# EAGLE board ccshield (EAGLE 5.04)
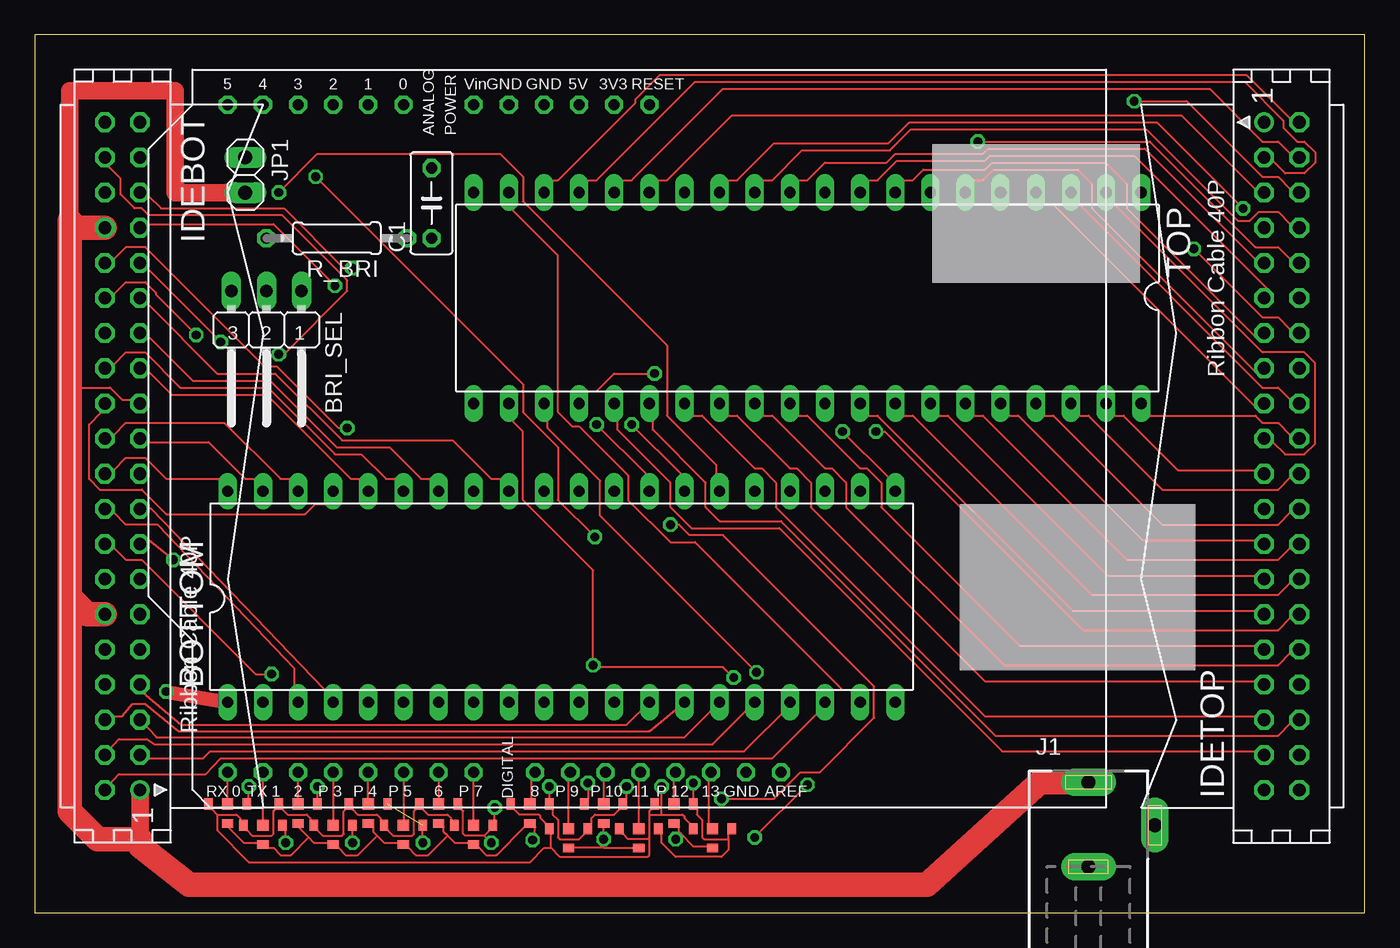
[diagram p0: board, top side]
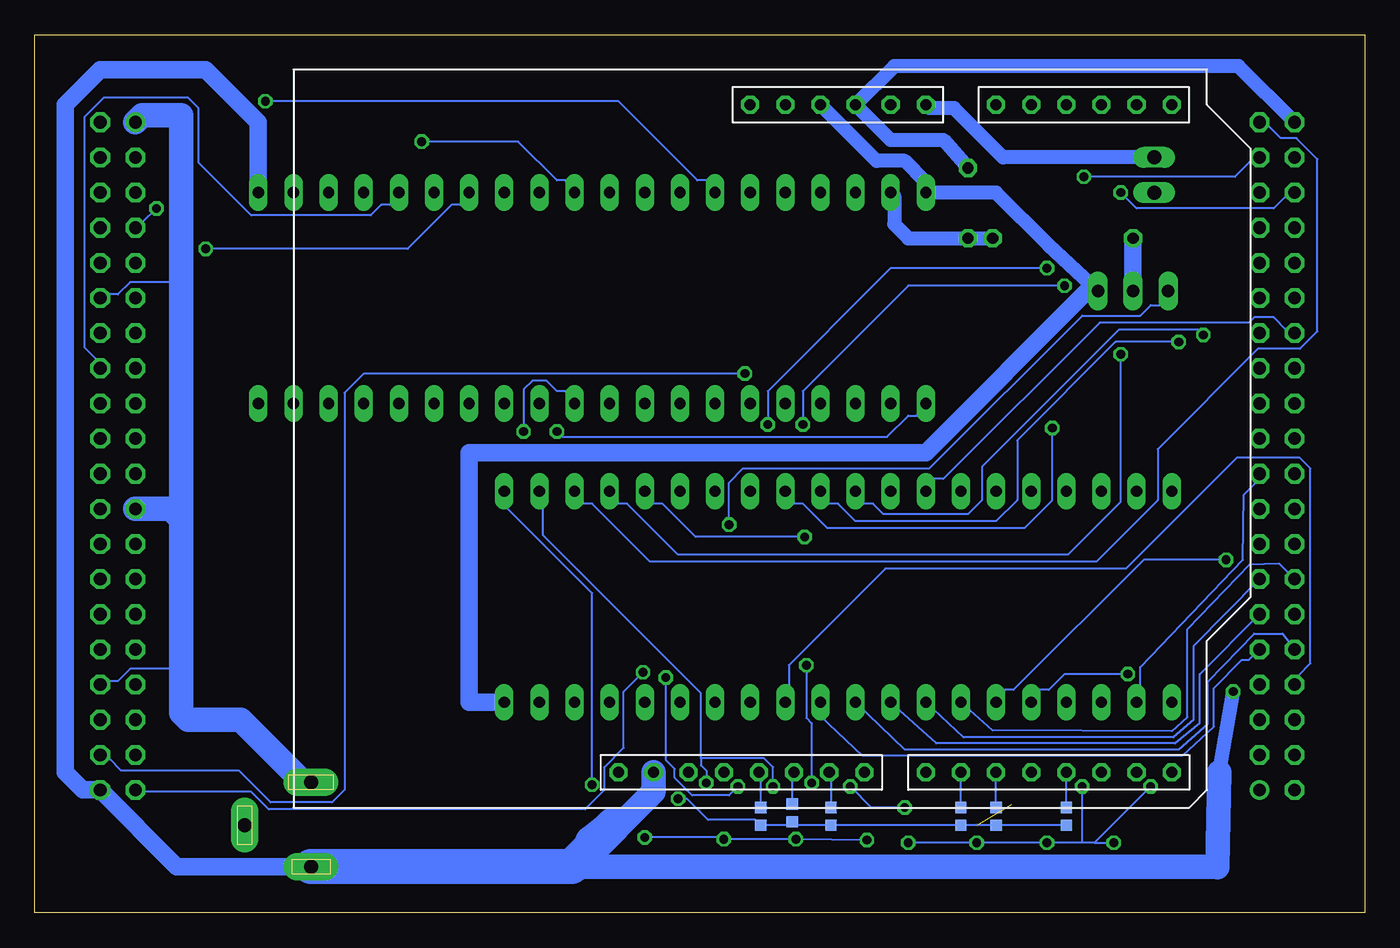
[diagram p1: board, bottom side, seen from below]

Size 96.19 x 63.49 mm. Coordinates in mm from the lower left corner, seen from the top.
Outline: 0,0 96.19,0 96.19,63.49 0,63.49 0,0
Copper layers (1*16): Top 0.035mm / dielectric 1.5mm / Bottom 0.035mm
Design rules "default *": minimum track width 6mil, minimum drill 25mil, track to track 10mil, track to pad 10mil, pad to pad 10mil, via to via 0.6mm, smd to smd 10mil, copper to edge 25mil, drill to drill 0.7mm, minimum pad ring 10mil, minimum via ring 8mil, stop-mask expansion 4mil, vias tented up to drill 0mil, thermal gap 10mil

## Footprints (pad centres in the part's own frame; a part is rotated, then mirrored left to right if it is on the bottom)
DIL40 = drill 0.813 long: BRIGHTNESS 21.59,-7.62; CLKIN 24.13,7.62; DATAIN 21.59,7.62; GND -24.13,-7.62; OUT01 19.05,-7.62; OUT02 16.51,-7.62; OUT03 13.97,-7.62; OUT04 11.43,-7.62; OUT05 8.89,-7.62; OUT06 6.35,-7.62; OUT07 3.81,-7.62; OUT08 1.27,-7.62; OUT09 -1.27,-7.62; OUT10 -3.81,-7.62; OUT11 -6.35,-7.62; OUT12 -8.89,-7.62; OUT13 -11.43,-7.62; OUT14 -13.97,-7.62; OUT15 -16.51,-7.62; OUT16 -19.05,-7.62; OUT17 -21.59,-7.62; OUT18 -24.13,7.62; OUT19 -21.59,7.62; OUT20 -19.05,7.62; OUT21 -16.51,7.62; OUT22 -13.97,7.62; OUT23 -11.43,7.62; OUT24 -8.89,7.62; OUT25 -6.35,7.62; OUT26 -3.81,7.62; OUT27 -1.27,7.62; OUT28 1.27,7.62; OUT29 3.81,7.62; OUT30 6.35,7.62; OUT31 8.89,7.62; OUT32 11.43,7.62; OUT33 13.97,7.62; OUT34 16.51,7.62; OUT35 19.05,7.62; PWR 24.13,-7.62
JP2W = drill 0.914 long: 1 -2.54,-1.27; 2 0,-1.27; 3 2.54,-1.27
C050-030X075 = drill 0.813 octagon: 1 -2.54,0; 2 2.54,0
CON40L = drill 0.914 round: 1 24.13,1.27 | drill 0.914 octagon: 2 24.13,-1.27; 3 21.59,1.27; 4 21.59,-1.27; 5 19.05,1.27; 6 19.05,-1.27; 7 16.51,1.27; 8 16.51,-1.27; 9 13.97,1.27; 10 13.97,-1.27; 11 11.43,1.27; 12 11.43,-1.27; 13 8.89,1.27; 14 8.89,-1.27; 15 6.35,1.27; 16 6.35,-1.27; 17 3.81,1.27; 18 3.81,-1.27; 19 1.27,1.27; 20 1.27,-1.27; 21 -1.27,1.27; 22 -1.27,-1.27; 23 -3.81,1.27; 24 -3.81,-1.27; 25 -6.35,1.27; 26 -6.35,-1.27; 27 -8.89,1.27; 28 -8.89,-1.27; 29 -11.43,1.27; 30 -11.43,-1.27; 31 -13.97,1.27; 32 -13.97,-1.27; 33 -16.51,1.27; 34 -16.51,-1.27; 35 -19.05,1.27; 36 -19.05,-1.27; 37 -21.59,1.27; 38 -21.59,-1.27; 39 -24.13,1.27; 40 -24.13,-1.27
DCJ0202 = drill 1 pad 2 long: 1 0,3.1; 2 4.8,0; 3 0,-3
1X02 = drill 1.016 long: 1 -1.27,0; 2 1.27,0
0207/10 = drill 0.813 octagon: 1 -5.08,0; 2 5.08,0
SBM1.3-1 = smd 0.813 x 0.813: IN 0,0 | smd 0.813 x 0.61: OUT1 0,1.397; OUT3 0,-1.397 | smd 0.61 x 0.813: OUT2 1.397,0
SHIELD-OCTAGONALPAD = drill 0.8 pad 1.27 octagon: 0_RX -25.4,27.94; 1_TX -25.4,25.4; 2 -25.4,22.86; 3 -25.4,20.32; 3V3 22.86,0; 4 -25.4,17.78; 5 -25.4,15.24; 5V 22.86,2.54; 6 -25.4,12.7; 7 -25.4,10.16; 8 -25.4,5.715; 9 -25.4,3.175; 10 -25.4,0.635; 11 -25.4,-1.905; 12 -25.4,-4.445; 13 -25.4,-6.985; A_0 22.86,15.24; A_1 22.86,17.78; A_2 22.86,20.32; A_3 22.86,22.86; A_4 22.86,25.4; A_5 22.86,27.94; AREF -25.4,-12.065; GND0 -25.4,-9.525; GND1 22.86,7.62; GND2 22.86,5.08; RESET 22.86,-2.54; VIN 22.86,10.16
SBM1.1 = smd 0.813 x 0.813: IN 0,0; OUT 1.27,0

## Placement (x,y rotation side)
BOTTOM  ST-M5451PDIP40  [DIL40]  38.1,22.86 0 top
BRI_SEL  [JP2W]  16.76,43.69 180 top
C1  [C050-030X075]  28.7,51.31 90 top
IDEBOT  [CON40L]  6.35,33.02 270 top
IDETOP  [CON40L]  90.17,33.02 90 top
J1  DCJ0202  [DCJ0202]  76.2,6.35 0 top
JP1  [1X02]  15.24,53.34 270 top
R_BRI  [0207/10]  21.84,48.77 180 top
TOP  ST-M5451PDIP40  [DIL40]  55.88,44.45 180 top
U$2  SBM1-3SMD  [SBM1.3-1]  13.97,7.87 270 top
U$3  ARDUINO-USBOCTAGONAL_PADS  [SHIELD-OCTAGONALPAD]  41.91,35.56 90 top
U$4  SBM1.1  [SBM1.1]  43.69,7.62 270 bottom
U$5  SBM1-3SMD  [SBM1.3-1]  16.51,6.35 270 top
U$6  SBM1-3SMD  [SBM1.3-1]  19.05,7.87 270 top
U$7  SBM1-3SMD  [SBM1.3-1]  21.59,6.35 270 top
U$8  SBM1-3SMD  [SBM1.3-1]  24.13,7.87 270 top
U$9  SBM1-3SMD  [SBM1.3-1]  26.67,6.35 270 top
U$10  SBM1-3SMD  [SBM1.3-1]  29.21,7.87 270 top
U$11  SBM1-3SMD  [SBM1.3-1]  31.75,6.35 270 top
U$12  SBM1-3SMD  [SBM1.3-1]  35.81,7.87 270 top
U$13  SBM1-3SMD  [SBM1.3-1]  38.61,6.1 270 top
U$14  SBM1-3SMD  [SBM1.3-1]  41.15,7.87 270 top
U$15  SBM1-3SMD  [SBM1.3-1]  43.69,6.1 270 top
U$16  SBM1-3SMD  [SBM1.3-1]  46.23,7.87 270 top
U$17  SBM1-3SMD  [SBM1.3-1]  49.02,6.1 270 top
U$18  SBM1.1  [SBM1.1]  41.4,7.87 270 bottom
U$19  SBM1.1  [SBM1.1]  38.61,7.62 270 bottom
U$20  SBM1.1  [SBM1.1]  29.21,7.62 270 bottom
U$21  SBM1.1  [SBM1.1]  26.67,7.62 270 bottom
U$22  SBM1.1  [SBM1.1]  21.59,7.62 270 bottom

## Library data of the parts
BOTTOM TOP U$2 U$4-U$22 = stone
BRI_SEL = jumper
C1 R_BRI = rcl
IDEBOT IDETOP = con-harting
J1 = con-jack
JP1 = pinhead
U$3 = Arduino-Various

## Nets
3V3: U$3.3V3
CLK: BOTTOM.CLKIN TOP.CLKIN U$2.OUT2 U$5.OUT2 U$6.OUT2 U$7.OUT2 U$8.OUT2 U$9.OUT2 U$10.OUT2 U$11.OUT2 U$12.OUT2 U$13.OUT2 U$14.OUT2 U$15.OUT2 U$16.OUT2 U$17.OUT2
GND2: C1.2 IDEBOT.40 U$3.GND2
N$2: BRI_SEL.2 R_BRI.2
N$3: BOTTOM.BRIGHTNESS C1.1 R_BRI.1 TOP.BRIGHTNESS
N$4: JP1.1 U$3.VIN
N$6: IDETOP.2 TOP.OUT01
N$7: IDETOP.3 TOP.OUT02
N$8: IDETOP.4 TOP.OUT03
N$9: IDETOP.5 TOP.OUT04
N$10: IDETOP.6 TOP.OUT05
N$11: IDETOP.7 TOP.OUT06
N$12: IDETOP.8 TOP.OUT07
N$13: IDETOP.9 TOP.OUT08
N$14: IDETOP.10 TOP.OUT09
N$15: IDETOP.11 TOP.OUT10
N$16: TOP.DATAIN U$2.OUT3 U$5.OUT3 U$6.OUT3 U$7.OUT3 U$8.OUT3 U$9.OUT3 U$10.OUT3 U$11.OUT3 U$12.OUT3 U$13.OUT3 U$14.OUT3 U$15.OUT3 U$16.OUT3 U$17.OUT3
N$17: IDETOP.13 TOP.OUT11
N$18: IDETOP.14 TOP.OUT12
N$19: IDETOP.15 TOP.OUT13
N$20: IDETOP.16 TOP.OUT14
N$21: IDETOP.17 TOP.OUT15
N$22: IDETOP.18 TOP.OUT16
N$23: IDETOP.19 TOP.OUT17
N$24: IDETOP.20 TOP.OUT18
N$25: IDETOP.24 TOP.OUT21
N$26: IDETOP.22 TOP.OUT20
N$27: IDETOP.21 TOP.OUT19
N$28: IDETOP.25 TOP.OUT22
N$29: IDETOP.26 TOP.OUT23
N$30: IDETOP.27 TOP.OUT24
N$31: IDETOP.28 TOP.OUT25
N$32: IDETOP.29 TOP.OUT26
N$33: IDETOP.30 TOP.OUT27
N$34: IDETOP.31 TOP.OUT28
N$35: IDETOP.32 TOP.OUT29
N$36: IDETOP.33 TOP.OUT30
N$37: IDETOP.35 TOP.OUT31
N$38: IDETOP.36 TOP.OUT32
N$39: IDETOP.37 TOP.OUT33
N$40: IDETOP.38 TOP.OUT34
N$41: IDETOP.39 TOP.OUT35
N$42: BOTTOM.DATAIN U$2.OUT1 U$5.OUT1 U$6.OUT1 U$7.OUT1 U$8.OUT1 U$9.OUT1 U$10.OUT1 U$11.OUT1 U$12.OUT1 U$13.OUT1 U$14.OUT1 U$15.OUT1 U$16.OUT1 U$17.OUT1
N$43: U$2.IN U$3.0_RX
N$44: BOTTOM.OUT03 IDEBOT.4
N$45: BOTTOM.OUT04 IDEBOT.5
N$46: BOTTOM.OUT05 IDEBOT.6
N$47: BOTTOM.OUT07 IDEBOT.8
N$48: BOTTOM.OUT08 IDEBOT.9
N$49: U$3.1_TX U$5.IN
N$50: BOTTOM.OUT01 IDEBOT.2
N$51: BOTTOM.OUT02 IDEBOT.3
N$52: BOTTOM.OUT06 IDEBOT.7
N$53: BOTTOM.OUT09 IDEBOT.10
N$54: BOTTOM.OUT10 IDEBOT.11
N$55: BOTTOM.OUT11 IDEBOT.13
N$56: BOTTOM.OUT12 IDEBOT.14
N$57: BOTTOM.OUT13 IDEBOT.15
N$58: BOTTOM.OUT14 IDEBOT.16
N$59: BOTTOM.OUT15 IDEBOT.17
N$60: BOTTOM.OUT16 IDEBOT.18
N$61: BOTTOM.OUT17 IDEBOT.19
N$62: BOTTOM.OUT18 IDEBOT.20
N$63: BOTTOM.OUT20 IDEBOT.22
N$64: BOTTOM.OUT19 IDEBOT.21
N$65: BOTTOM.OUT21 IDEBOT.24
N$66: BOTTOM.OUT22 IDEBOT.25
N$67: BOTTOM.OUT23 IDEBOT.26
N$68: BOTTOM.OUT24 IDEBOT.27
N$69: BOTTOM.OUT25 IDEBOT.28
N$70: BOTTOM.OUT26 IDEBOT.29
N$71: BOTTOM.OUT27 IDEBOT.30
N$72: BOTTOM.OUT28 IDEBOT.31
N$73: BOTTOM.OUT29 IDEBOT.32
N$74: BOTTOM.OUT30 IDEBOT.33
N$75: BOTTOM.OUT31 IDEBOT.35
N$76: BOTTOM.OUT32 IDEBOT.36
N$77: BOTTOM.OUT33 IDEBOT.37
N$78: BOTTOM.OUT34 IDEBOT.38
N$79: BOTTOM.OUT35 IDEBOT.39
N$80: U$3.2 U$6.IN
N$81: U$3.3 U$7.IN U$22.IN
N$82: U$3.4 U$8.IN
N$83: U$3.5 U$9.IN U$21.IN
N$84: U$3.6 U$10.IN U$20.IN
N$85: U$3.7 U$11.IN
N$86: U$3.8 U$12.IN
N$87: U$3.9 U$13.IN U$19.IN
N$88: U$3.10 U$14.IN U$18.IN
N$89: U$3.11 U$4.IN U$15.IN
N$90: U$3.12 U$16.IN
N$91: U$3.13 U$17.IN
N$92: BRI_SEL.3 U$4.OUT U$18.OUT U$19.OUT U$20.OUT U$21.OUT U$22.OUT
N$95: BOTTOM.GND IDETOP.40 J1.3 TOP.GND U$3.GND0
PWR_IC: BOTTOM.PWR BRI_SEL.1 TOP.PWR U$3.5V
PWRNET: IDEBOT.1 IDEBOT.12 IDEBOT.23 IDEBOT.34 IDETOP.1 IDETOP.12 IDETOP.23 IDETOP.34 J1.1 JP1.2

## Tracks (layer width: path | path; a pad name or v marks a point on that pad's centre or on a via)
CLK  (via drill 0.64)
  Top 0.152: 46.74,5.71 47.62,4.83 48.64,4.83 U$17.OUT2 | 46.74,5.71 46.61,5.84 46.61,6.22 U$16.OUT2 | 41.15,4.7 U$13.OUT2 | 41.15,4.7 U$15.OUT2 | 41.15,4.7 v41.15,5.33 U$14.OUT2 | v46.35,5.33 46.74,5.71 | 29.84,5.59 30.35,5.08 31.37,5.08 U$11.OUT2 32.13,4.7 32.64,4.19 33.4,4.19 35.43,6.22 U$12.OUT2 36.2,6.22 v36.01,5.27 | 29.84,5.59 29.59,5.84 29.59,6.22 U$10.OUT2 | 24.77,5.59 25.27,5.08 26.29,5.08 U$9.OUT2 27.05,4.7 27.56,4.19 28.45,4.19 29.84,5.59 | 24.77,5.59 24.51,5.84 24.51,6.22 U$8.OUT2 | U$2.OUT2 13.97,6.22 15.11,5.08 16.13,5.08 U$5.OUT2 16.89,4.7 17.27,4.7 17.78,4.19 18.54,4.19 19.81,5.46 | 19.81,5.46 19.05,6.22 U$6.OUT2 | 19.81,5.46 20.19,5.08 21.21,5.08 U$7.OUT2 21.97,4.7 22.48,4.19 23.37,4.19 24.77,5.59 | v58.42,34.8 61.72,31.5 BOTTOM.CLKIN | v52.07,5.46 v55.88,9.27
  Bottom 0.152: v36.01,5.27 v41.15,5.33 v46.35,5.33 46.86,5.46 v52.07,5.46 | v58.42,34.8 58.04,34.42 34.54,34.42 33.02,35.94 32.38,35.94 TOP.CLKIN | v55.88,9.27 55.88,23.11 61.98,29.21 BOTTOM.CLKIN
GND2
  Bottom 1.016: C1.2 30.48,55.88 34.29,55.88 U$3.GND2 34.04,61.21 9.14,61.21 IDEBOT.40
N$2
  Bottom 1.27: BRI_SEL.2 R_BRI.2
N$3
  Top 0.152: BOTTOM.BRIGHTNESS 59.05,16.13 58.42,16.13 47.75,26.8 45.97,26.8 42.93,29.84 42.93,31.62 39.37,35.18 38.86,35.18 37.85,36.19 37.85,47.5 34.54,50.8 TOP.BRIGHTNESS
  Bottom 1.016: R_BRI.1 C1.1 33.02,48.77 34.04,49.78 34.04,51.82 TOP.BRIGHTNESS
N$4
  Bottom 1.016: JP1.1 26.16,54.61 29.72,58.17 31.5,58.17 U$3.VIN
N$6
  Top 0.152: TOP.OUT01 37.47,52.96 37.85,52.96 43.43,58.55 43.43,58.8 45.21,60.58 87.63,60.58 90.81,57.4 IDETOP.2
N$7
  Top 0.152: TOP.OUT02 40.01,52.96 40.64,52.96 47.75,60.07 87.5,60.07 90.3,57.28 90.3,56.77 91.31,55.75 91.82,55.75 92.58,54.99 92.58,54.23 91.82,53.47 90.42,53.47 89.53,54.36 IDETOP.3
N$8
  Top 0.152: TOP.OUT03 42.55,52.96 43.18,52.96 49.78,59.56 84.96,59.56 88.77,55.75 89.92,55.75 90.81,54.86 IDETOP.4
N$9
  Top 0.152: TOP.OUT04 45.09,52.96 45.72,52.96 50.42,57.66 82.93,57.66 88.27,52.32 IDETOP.5
N$10  (via drill 0.64)
  Top 0.152: v79.5,58.67 83.31,58.67 88.77,53.21 89.92,53.21 90.81,52.32 IDETOP.6
  Bottom 0.152: v79.5,58.67 53.98,58.67 48.26,52.96 47.62,52.96 TOP.OUT05
N$11  (via drill 0.64)
  Top 0.152: v87.38,50.93 81.15,57.15 63.25,57.15 61.72,55.63 53.47,55.63 50.8,52.96 50.16,52.96 TOP.OUT06
  Bottom 0.152: v87.38,50.93 88.39,49.91 IDETOP.7
N$12
  Top 0.152: TOP.OUT07 52.7,52.96 53.34,52.96 55.5,55.12 61.85,55.12 63.37,56.64 80.39,56.64 87,50.04 87.88,50.04 88.52,50.67 89.92,50.67 90.81,49.78 IDETOP.8
N$13
  Top 0.152: TOP.OUT08 55.24,52.96 55.88,52.96 57.15,54.23 61.59,54.23 62.23,54.86 68.58,54.86 68.96,55.24 80.26,55.24 88.27,47.24 IDETOP.9
N$14  (via drill 0.64)
  Top 0.152: v68.2,55.75 80.64,55.75 88.27,48.13 89.92,48.13 90.81,47.24 IDETOP.10
  Bottom 0.152: v68.2,55.75 61.21,55.75 58.42,52.96 57.78,52.96 TOP.OUT09
N$15
  Top 0.152: TOP.OUT10 60.33,52.96 60.96,52.96 62.36,54.36 68.71,54.36 69.09,54.74 79.5,54.74 89.15,45.08 IDETOP.11
N$16  (via drill 0.64)
  Top 0.152: v40.01,9.4 40.01,8.25 U$14.OUT3 | TOP.DATAIN 34.54,35.56 35.31,34.8 35.31,29.84 40.39,24.76 v40.39,17.91 40.89,17.78 49.78,17.78 v50.55,17.02 | U$12.OUT3 34.67,7.49 35.05,7.11 36.45,7.11 36.58,6.98 36.58,6.86 36.96,6.48 U$13.OUT3 37.34,5.71 37.34,4.7 | 44.45,5.46 44.32,5.33 42.93,5.33 42.55,5.71 U$15.OUT3 | 44.45,7.11 44.45,7.37 44.58,7.49 U$16.OUT3 | 44.45,5.46 44.45,7.11 | 44.45,7.11 45.34,7.11 | 45.34,7.11 46.86,7.11 46.99,6.98 46.99,6.86 47.37,6.48 U$17.OUT3 | 37.34,4.7 37.97,4.06 44.32,4.06 44.45,4.19 44.45,5.46 | 13.21,7.11 14.61,7.11 14.86,6.86 14.86,6.73 U$5.OUT3 15.37,5.97 15.75,5.59 17.14,5.59 17.27,5.71 17.27,7.37 17.4,7.49 U$6.OUT3 17.91,7.49 18.29,7.11 19.68,7.11 19.94,6.86 19.94,6.73 U$7.OUT3 20.45,5.97 20.83,5.59 22.23,5.59 22.35,5.71 22.35,7.37 22.48,7.49 U$8.OUT3 22.99,7.49 23.37,7.11 24.77,7.11 25.02,6.86 25.02,6.73 U$9.OUT3 25.53,5.97 25.91,5.59 27.3,5.59 27.43,5.71 27.43,7.37 27.56,7.49 U$10.OUT3 28.07,7.49 28.45,7.11 29.84,7.11 30.1,6.86 30.1,6.73 U$11.OUT3 | 13.21,7.11 12.83,7.49 U$2.OUT3 | 37.34,4.7 36.83,4.7 35.81,3.68 15.49,3.68 13.21,5.97 13.21,7.11 | 45.34,7.11 v45.34,9.14
  Bottom 0.152: v40.01,9.4 40.01,13.72 40.39,14.1 v40.39,17.91 | v50.55,17.02 50.55,11.05 49.91,10.41 49.91,9.78 48.64,8.51 45.97,8.51 v45.34,9.14
N$17
  Top 0.152: TOP.OUT11 62.87,52.96 63.5,52.96 64.26,53.72 68.71,53.72 69.22,54.23 77.47,54.23 78.99,52.7 78.99,50.93 88.27,41.66 IDETOP.13
N$18  (via drill 0.64)
  Top 0.152: v83.82,48.01 88.77,43.05 89.92,43.05 90.81,42.16 IDETOP.14
  Bottom 0.152: v83.82,48.01 69.22,48.01 66.04,51.18 65.41,51.18 TOP.OUT12
N$19
  Top 0.152: TOP.OUT13 67.94,52.96 68.58,52.96 69.34,53.72 75.44,53.72 76.45,52.7 76.45,50.93 88.27,39.12 IDETOP.15
N$20
  Bottom 0.152: TOP.OUT14 70.48,51.18 71.12,51.18 71.88,50.42 80.52,50.42 84.33,54.23 84.33,58.17 85.09,58.93 91.19,58.93 92.58,57.53 92.58,40.89 91.69,40 IDETOP.16
N$21
  Top 0.152: TOP.OUT15 73.03,51.18 73.66,51.18 88.27,36.58 IDETOP.17
N$22
  Top 0.152: TOP.OUT16 75.56,51.18 88.77,37.97 89.92,37.97 90.81,37.08 IDETOP.18
N$23
  Top 0.152: TOP.OUT17 78.11,51.18 88.77,40.51 91.82,40.51 92.58,39.75 92.58,33.91 91.82,33.15 90.42,33.15 89.53,34.04 IDETOP.19
N$24
  Top 0.152: TOP.OUT18 80.64,35.94 88.27,35.94 88.77,35.43 89.92,35.43 90.81,34.54 IDETOP.20
N$25
  Top 0.152: TOP.OUT21 73.03,35.94 73.66,35.94 81.53,28.07 89.92,28.07 90.81,28.96 IDETOP.24
N$26
  Top 0.152: TOP.OUT20 75.56,35.94 76.2,35.94 81.53,30.61 89.92,30.61 90.81,31.5 IDETOP.22
N$27
  Top 0.152: TOP.OUT19 78.11,35.94 78.74,35.94 82.68,32 88.27,32 IDETOP.21
N$28
  Top 0.152: TOP.OUT22 70.48,35.94 71.12,35.94 80.14,26.92 88.27,26.92 IDETOP.25
N$29
  Top 0.152: TOP.OUT23 67.94,35.94 68.58,35.94 78.99,25.53 89.92,25.53 90.81,26.42 IDETOP.26
N$30
  Top 0.152: TOP.OUT24 65.41,35.94 66.04,35.94 77.6,24.38 88.27,24.38 IDETOP.27
N$31
  Top 0.152: TOP.OUT25 62.87,35.94 63.5,35.94 76.45,22.99 89.92,22.99 90.81,23.88 IDETOP.28
N$32
  Top 0.152: TOP.OUT26 60.33,35.94 60.96,35.94 75.06,21.84 88.27,21.84 IDETOP.29
N$33  (via drill 0.64)
  Top 0.152: v60.83,34.8 61.47,34.8 75.82,20.45 89.92,20.45 90.81,21.34 IDETOP.30
  Bottom 0.152: v60.83,34.8 60.83,37.85 60.2,38.48 59.18,38.48 58.42,37.72 57.78,37.72 TOP.OUT27
N$34
  Top 0.152: TOP.OUT28 55.24,35.94 55.88,35.94 59.69,32.13 60.2,32.13 61.21,31.11 61.21,29.34 71.25,19.3 88.27,19.3 IDETOP.31
N$35
  Top 0.152: TOP.OUT29 52.7,35.94 53.34,35.94 57.15,32.13 57.66,32.13 58.67,31.11 58.67,29.34 70.1,17.91 89.92,17.91 90.81,18.8 IDETOP.32
N$36
  Top 0.152: TOP.OUT30 50.16,35.94 50.8,35.94 54.61,32.13 55.12,32.13 56.13,31.11 56.13,29.34 68.71,16.76 88.27,16.76 IDETOP.33
N$37
  Top 0.152: TOP.OUT31 47.62,35.94 48.26,35.94 52.07,32.13 52.58,32.13 53.59,31.11 53.59,29.34 68.71,14.22 88.27,14.22 IDETOP.35
N$38
  Top 0.152: TOP.OUT32 44.7,35.56 44.7,34.92 48.51,31.11 48.51,29.34 49.53,28.32 53.98,28.32 69.47,12.83 89.92,12.83 90.81,13.72 IDETOP.36
N$39
  Top 0.152: TOP.OUT33 42.16,35.56 42.16,34.92 45.97,31.11 45.97,29.34 47.5,27.81 53.85,27.81 69.98,11.68 88.27,11.68 IDETOP.37
N$40  (via drill 0.64)
  Top 0.152: v44.83,38.99 41.91,38.99 40.64,37.72 40.01,37.72 TOP.OUT34
  Bottom 0.152: v44.83,38.99 72.39,38.99 73.79,37.59 73.79,8.89 74.68,8 79.12,8 81.41,10.29 89.92,10.29 90.81,11.18 IDETOP.38
N$41  (via drill 0.64)
  Top 0.152: v52.2,17.4 40.89,28.7 40.89,31.24 37.08,35.05 37.08,35.56 TOP.OUT35
  Bottom 0.152: v52.2,17.4 53.59,16 53.59,11.94 54.99,10.54 54.99,8.89 56.39,7.49 79.25,7.49 80.52,8.76 88.27,8.76 IDETOP.39
N$42  (via drill 0.64)  (1 unrouted)
  Top 0.152: 32.51,5.59 32.89,5.97 U$11.OUT1 33.27,6.73 v33.27,7.62 | 32.51,5.59 31.11,5.59 30.99,5.71 30.99,7.37 30.86,7.49 U$10.OUT1 | v18.16,5.08 18.16,5.97 U$5.OUT1 | v22.99,5.08 U$7.OUT1 | v28.07,5.08 U$9.OUT1 | v15.49,9.14 15.49,8.25 U$2.OUT1 | v20.45,9.14 U$6.OUT1 | v33.02,5.08 32.51,5.59 | 50.16,5.33 50.16,5.71 U$17.OUT1 | 50.16,5.33 50.16,4.57 49.66,4.06 46.35,4.06 45.34,5.08 45.34,5.71 U$15.OUT1 | 50.16,5.33 48.39,5.33 48.26,5.46 48.26,6.73 47.88,7.11 47.88,7.49 U$16.OUT1 v47.62,9.4 | v42.8,9.14 42.8,8.25 U$14.OUT1 42.29,7.49 41.91,7.11 40.51,7.11 40.26,6.86 40.26,6.48 U$13.OUT1 39.75,5.71 39.37,5.33 37.97,5.33 37.85,5.46 37.85,6.73 37.47,7.11 37.47,7.49 U$12.OUT1 v37.21,9.14
  Bottom 0.152: 20.45,5.08 v22.99,5.08 v28.07,5.08 v33.02,5.08 | 19.56,5.08 20.45,5.08 | 19.56,5.08 v18.16,5.08 | v15.49,9.14 19.56,5.08 | 20.45,5.08 v20.45,9.14 | 48.01,11.18 48.01,10.67 47.62,10.29 v47.62,9.4 | 48.01,11.18 48.01,15.87 59.44,27.3 59.44,29.21 BOTTOM.DATAIN | v42.8,9.14 42.8,10.54 43.43,11.18 48.01,11.18 | v33.27,7.62 35.69,7.62 v37.21,9.14
N$43
  Top 0.152: U$2.IN U$3.0_RX
N$44
  Top 0.152: BOTTOM.OUT03 49.02,12.19 8.7,12.19 8.13,12.57 6.1,12.57 IDEBOT.4
N$45
  Top 0.152: BOTTOM.OUT04 46.99,12.7 8.83,12.7 IDEBOT.5
N$46
  Top 0.152: BOTTOM.OUT05 44.45,13.14 10.41,13.14 8,15.11 7.11,15.11 6.35,14.22 5.33,14.22 IDEBOT.6
N$47
  Bottom 0.152: BOTTOM.OUT07 41.66,16.51 41.66,17.91 34.67,24.89 17.27,24.89 9.27,32.89 4.7,32.89 3.94,32.13 3.94,18.03 4.83,17.14 IDEBOT.8
N$48
  Bottom 0.152: BOTTOM.OUT08 39.37,14.22 36.32,11.37 13.21,11.37 10.92,13.46 10.92,16.26 8.89,18.29 8.38,18.29 IDEBOT.9
N$49
  Top 0.152: U$5.IN U$3.1_TX
N$50
  Top 0.152: BOTTOM.OUT01 57.15,14.99 53.34,11.18 13.46,11.18 12.38,10.03 6.1,10.03 IDEBOT.2
N$51
  Top 0.152: BOTTOM.OUT02 54.61,14.99 51.31,11.68 12.7,11.68 12.19,11.18 7.87,11.18 IDEBOT.3
N$52
  Top 0.152: BOTTOM.OUT06 42.8,13.59 10.6,13.59 8.06,15.75 IDEBOT.7
N$53
  Bottom 0.152: BOTTOM.OUT09 33.27,11.81 13.46,11.81 11.37,13.65 11.37,16.7 8,20.19 5.97,20.19 IDEBOT.10
N$54
  Bottom 0.152: BOTTOM.OUT10 30.99,12.25 13.72,12.25 11.94,13.72 11.94,17.27 IDEBOT.11
N$55
  Bottom 0.152: BOTTOM.OUT11 29.02,12.7 13.84,12.7 12.38,13.97 12.38,19.3 IDEBOT.13
N$56
  Bottom 0.152: BOTTOM.OUT12 26.92,13.21 13.97,13.14 12.83,14.16 12.83,20.51 8.32,25.21 6.22,25.27 IDEBOT.14
N$57  (via drill 0.64)
  Top 0.152: v10.03,25.53 8.26,26.92 IDEBOT.15
  Bottom 0.152: v10.03,25.53 16,25.53 25.4,16.13 26.04,16.13 BOTTOM.OUT13
N$58  (via drill 0.64)
  Top 0.152: v17.14,17.27 16,17.27 7.75,25.53 6.6,25.53 5.71,26.42 IDEBOT.16
  Bottom 0.152: v17.14,17.27 21.72,17.27 22.86,16.13 23.5,16.13 BOTTOM.OUT14
N$59
  Top 0.152: BOTTOM.OUT15 20.95,16.13 8.45,29.21 IDEBOT.17
N$60
  Top 0.152: BOTTOM.OUT16 18.8,16.51 18.8,17.65 8.89,28.07 6.6,28.07 5.71,28.96 IDEBOT.18
N$61
  Bottom 0.152: BOTTOM.OUT17 16.26,16.51 16.26,17.78 8.83,25.53 8.76,30.23 7.87,31.11 IDEBOT.19
N$62
  Top 0.152: BOTTOM.OUT18 13.34,31.37 9.53,31.37 8,32.89 6.6,32.89 5.71,32 IDEBOT.20
N$63
  Top 0.152: BOTTOM.OUT20 18.41,31.37 17.78,31.37 13.72,35.43 6.6,35.43 5.71,34.54 IDEBOT.22
N$64
  Top 0.152: BOTTOM.OUT19 15.88,31.37 15.24,31.37 12.57,34.04 8.26,34.04 IDEBOT.21
N$65
  Top 0.152: BOTTOM.OUT21 20.95,29.59 20.32,29.59 19.56,28.83 9.53,28.83 7.75,30.61 4.7,30.61 3.94,31.37 3.94,35.31 4.83,36.19 IDEBOT.24
N$66
  Top 0.152: BOTTOM.OUT22 23.5,31.37 22.86,31.37 16.76,37.47 9.91,37.47 8.26,39.12 IDEBOT.25
N$67
  Top 0.152: BOTTOM.OUT23 26.04,31.37 25.4,31.37 23.62,33.15 21.72,33.15 16.89,37.97 10.54,37.97 8,40.51 6.6,40.51 5.71,39.62 IDEBOT.26
N$68
  Top 0.152: BOTTOM.OUT24 28.57,31.37 27.94,31.37 25.65,33.66 21.84,33.66 17.02,38.48 11.43,38.48 8.26,41.66 IDEBOT.27
N$69
  Bottom 0.152: BOTTOM.OUT25 31.11,31.37 30.48,31.37 19.18,42.67 8.38,42.67 8,43.05 6.6,43.05 5.71,42.16 IDEBOT.28
N$70
  Top 0.152: BOTTOM.OUT26 33.66,31.37 33.02,31.37 30.23,34.16 22.23,34.16 17.4,38.99 13.21,38.99 8.13,44.07 IDEBOT.29
N$71  (via drill 0.64)
  Top 0.152: v11.68,41.78 8.76,44.7 8.76,44.83 8,45.59 6.6,45.59 5.71,44.7 IDEBOT.30
  Bottom 0.152: v11.68,41.78 12.06,42.16 17.78,42.16 27.69,32.26 27.69,29.84 28.7,28.83 34.8,28.83 35.56,29.59 36.2,29.59 BOTTOM.OUT27
N$72  (via drill 0.64)
  Top 0.152: v13.46,41.27 8.13,46.61 IDEBOT.31
  Bottom 0.152: v13.46,41.27 18.03,41.27 25.15,34.16 25.15,29.84 26.67,28.32 36.83,28.32 38.1,29.59 38.73,29.59 BOTTOM.OUT28
N$73  (via drill 0.64)
  Top 0.152: v22.61,35.05 21.97,35.05 17.53,39.5 16.64,39.5 8,48.13 6.6,48.13 5.71,47.24 IDEBOT.32
  Bottom 0.152: v22.61,35.05 22.61,29.84 24.64,27.81 38.86,27.81 40.64,29.59 41.27,29.59 BOTTOM.OUT29
N$74  (via drill 0.64)
  Top 0.152: v40.64,35.31 44.2,31.75 BOTTOM.OUT30 | v21.72,45.34 17.27,49.78 8.26,49.78 IDEBOT.33
  Bottom 0.152: v40.64,35.31 40.64,37.72 33.02,45.34 v21.72,45.34
N$75  (via drill 0.64)
  Top 0.152: v43.18,35.31 46.74,31.75 BOTTOM.OUT31 | v22.99,46.61 22.35,46.61 18.03,50.93 9.14,50.93 8.26,51.82 IDEBOT.35
  Bottom 0.152: v43.18,35.31 43.18,37.72 34.29,46.61 v22.99,46.61
N$76  (via drill 0.64)
  Top 0.152: v17.65,52.07 20.45,54.86 33.66,54.86 35.31,53.21 35.31,51.43 45.72,41.02 45.72,35.94 49.28,32.39 49.28,31.75 BOTTOM.OUT32
  Bottom 0.152: v17.65,52.07 16.51,50.93 6.6,50.93 5.71,51.82 IDEBOT.36
N$77  (via drill 0.64)
  Top 0.152: v40.51,27.18 37.85,29.84 37.85,33.66 35.31,36.19 35.31,38.23 v20.32,53.21
  Bottom 0.152: v40.51,27.18 48.39,27.18 50.8,29.59 51.44,29.59 BOTTOM.OUT33 | v20.32,53.21 9.4,53.21 8.26,54.36 IDEBOT.37
N$78  (via drill 0.64)
  Top 0.152: v17.65,40.39 18.03,40.39 22.61,44.96 22.61,45.72 17.91,50.42 8.26,50.42 7.75,50.93 7.24,50.93 6.22,51.94 6.22,53.09 5.33,53.97 IDEBOT.38
  Bottom 0.152: v17.65,40.39 17.65,29.72 21.46,25.91 49.66,25.91 53.34,29.59 53.98,29.59 BOTTOM.OUT34
N$79
  Bottom 0.152: BOTTOM.OUT35 56.52,29.59 55.88,29.59 51.69,25.4 19.43,25.4 14.99,29.84 14.99,33.53 7.75,40.77 4.7,40.77 3.43,42.04 3.43,54.48 4.95,56.01 6.1,56.01 6.99,56.9 IDEBOT.39
N$80
  Top 0.152: U$6.IN U$3.2
N$81
  Top 0.152: U$3.3 U$7.IN
  Bottom 0.152: U$22.IN U$3.3
N$82
  Top 0.152: U$8.IN U$3.4
N$83
  Top 0.152: U$3.5 U$9.IN
  Bottom 0.152: U$21.IN U$3.5
N$84
  Top 0.152: U$3.6 U$10.IN
  Bottom 0.152: U$20.IN U$3.6
N$85
  Top 0.152: U$11.IN U$3.7
N$86
  Top 0.152: U$12.IN 35.94,8.25 35.94,9.52 U$3.8
N$87
  Top 0.152: U$13.IN 38.61,9.52 U$3.9
  Bottom 0.152: U$19.IN 38.61,9.52 U$3.9
N$88
  Top 0.152: U$14.IN 41.15,9.52 U$3.10
  Bottom 0.152: U$18.IN 41.4,9.52 U$3.10
N$89
  Top 0.152: U$15.IN 43.69,9.52 U$3.11
  Bottom 0.152: U$4.IN 43.69,9.52 U$3.11
N$90
  Top 0.152: U$16.IN 46.23,9.52 U$3.12
N$91
  Top 0.152: U$17.IN 48.77,6.48 48.77,9.52 U$3.13
N$92  (via drill 0.64)
  Top 0.152: v45.97,28.07 46.61,28.07 47.37,27.3 49.78,27.3 60.71,16.38 60.71,14.1 56.77,10.16 55.37,10.16 53.47,8.25 v49.66,8.25
  Bottom 0.152: U$22.OUT U$21.OUT U$20.OUT U$19.OUT 41.02,6.35 U$18.OUT 41.78,6.35 U$4.OUT 44.07,6.73 47.5,6.73 49.02,8.25 v49.66,8.25 | v45.97,28.07 45.97,31.11 44.96,32.13 31.5,32.13 20.45,43.18 16.26,43.18 15.49,43.94 14.86,43.94 BRI_SEL.3
N$95  (via drill 0.64)
  Top 1.016: v9.53,16 BOTTOM.GND
  Bottom 0.152: 53.28,6.92 53.34,6.98 54.36,6.35
  Bottom 1.016: 10.54,10.16 v9.53,16
  Bottom 1.27: J1.3 85.9,3.35 IDETOP.40 92.71,8.89 93.98,10.16 93.98,58.42 91.44,60.96 83.82,60.96 80.01,57.15 TOP.GND
  Bottom 1.778: 10.67,3.35 57.36,3.35 | U$3.GND0 51.44,8.76 53.28,6.92 55.12,5.08 | 10.67,3.35 10.67,3.3 | 10.67,3.35 10.54,10.16
  Bottom 2.54: J1.3 57.36,3.35 54.61,6.1 | 54.61,6.1 54.36,6.35 | 54.61,6.1 55.88,5.08
PWR_IC
  Bottom 1.016: U$3.5V 35.31,54.36 33.27,54.36 31.75,52.83 TOP.PWR 26.67,52.07 22.86,48.26 BRI_SEL.1
  Bottom 1.27: BOTTOM.PWR 64.77,15.24 64.77,33.27 31.75,33.27 20.07,44.96 BRI_SEL.1
PWRNET
  Top 0.152: IDEBOT.23 6.99,37.08 6.35,37.08 5.46,37.97 2.54,37.97
  Top 1.27: 7.62,5.33 IDEBOT.1 | JP1.2 10.16,52.07 10.16,59.44 2.54,59.44 2.54,49.53
  Top 1.778: J1.1 72.7,9.45 64.52,2.03 11.18,2.03 7.62,4.83 7.62,5.33 4.57,5.33 2.54,7.37 2.54,22.86 | IDEBOT.12 3.81,21.59 2.54,22.86 | 2.54,22.86 2.54,37.97 2.54,49.53 2.54,50.04 3.05,49.53 IDEBOT.34
  Bottom 0.152: IDETOP.34 90.81,16.76 90.17,16.76 89.28,17.65 85.6,17.65 | IDETOP.12 90.81,44.7 90.17,44.7 89.28,45.59 85.6,45.59
  Bottom 1.778: J1.1 76.76,9.45 81.28,13.97 85.09,13.97 85.6,14.48 85.6,17.65 85.6,28.45 | 85.6,28.45 85.6,45.59 85.6,57.66 88.39,57.66 IDETOP.1 | IDETOP.23 86.36,29.21 85.6,28.45